# Altium PCB PCB.PcbDoc
Units mm, origin at the board's own origin, x right, y up, seen from the top; angles counter-clockwise.
Board outline 50 x 83.2 mm, 2 copper layers (Top Layer, Bottom Layer); 23 components, 7 nets, 107 pads, 0 vias.
Unrouted connection lines stored in the file: 42.
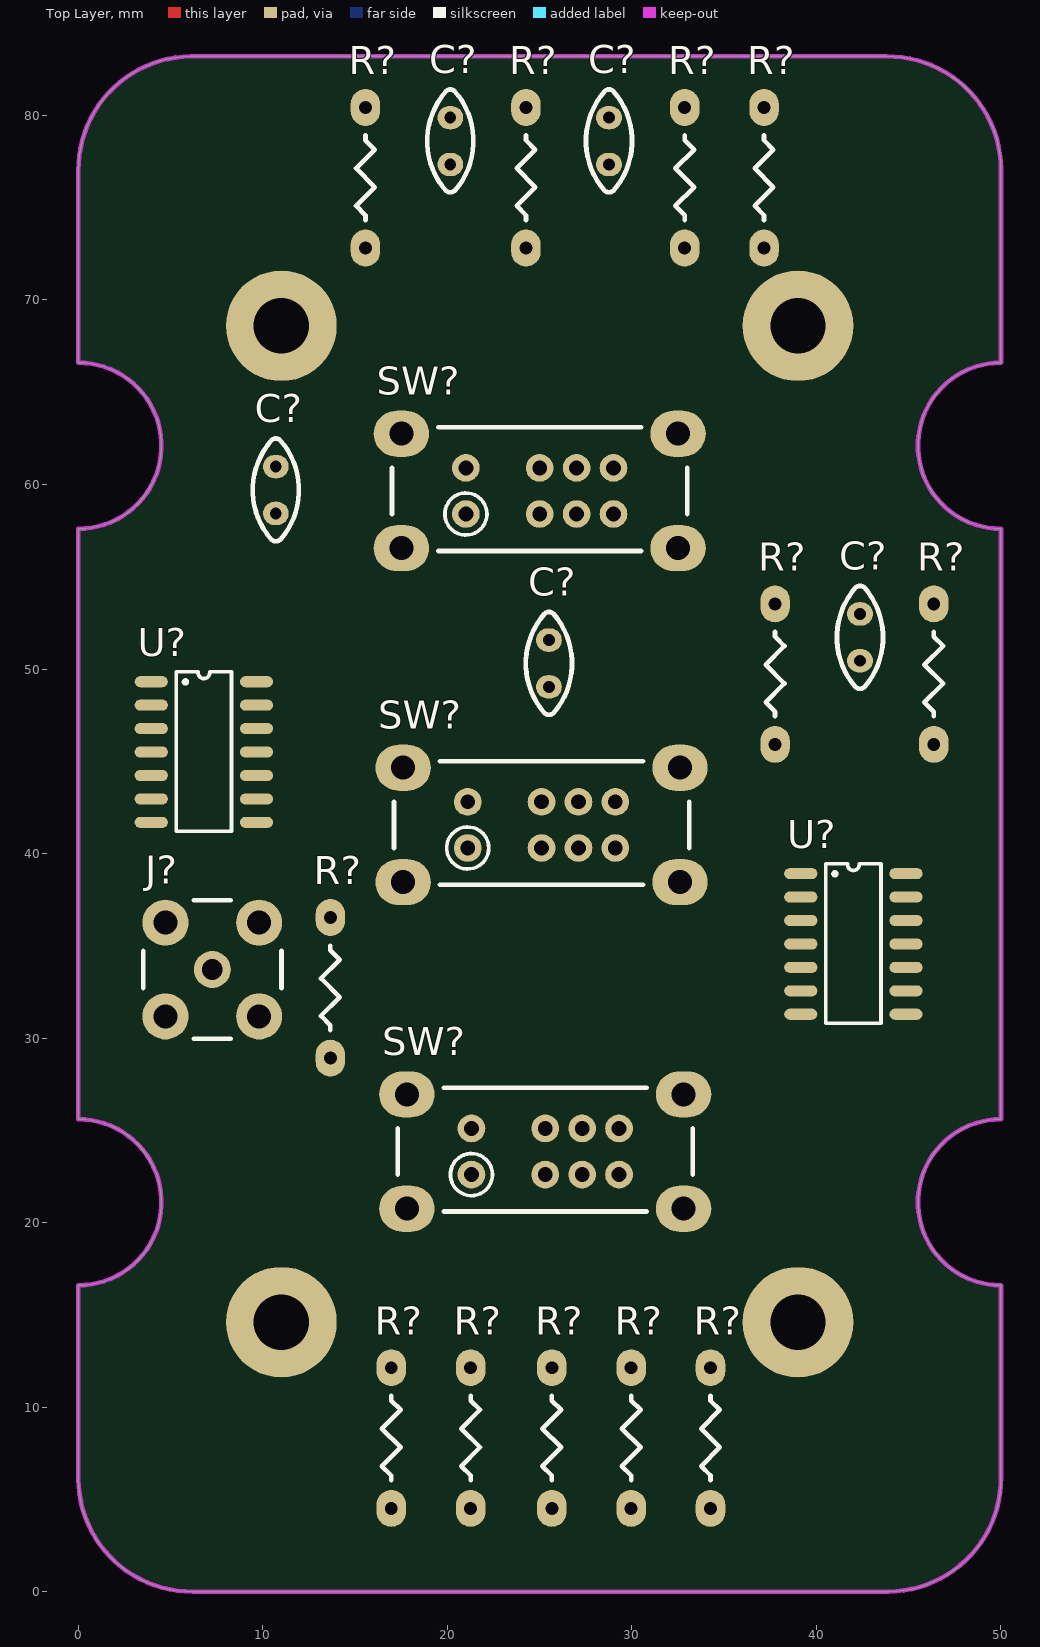
[diagram p0: Top Layer view]
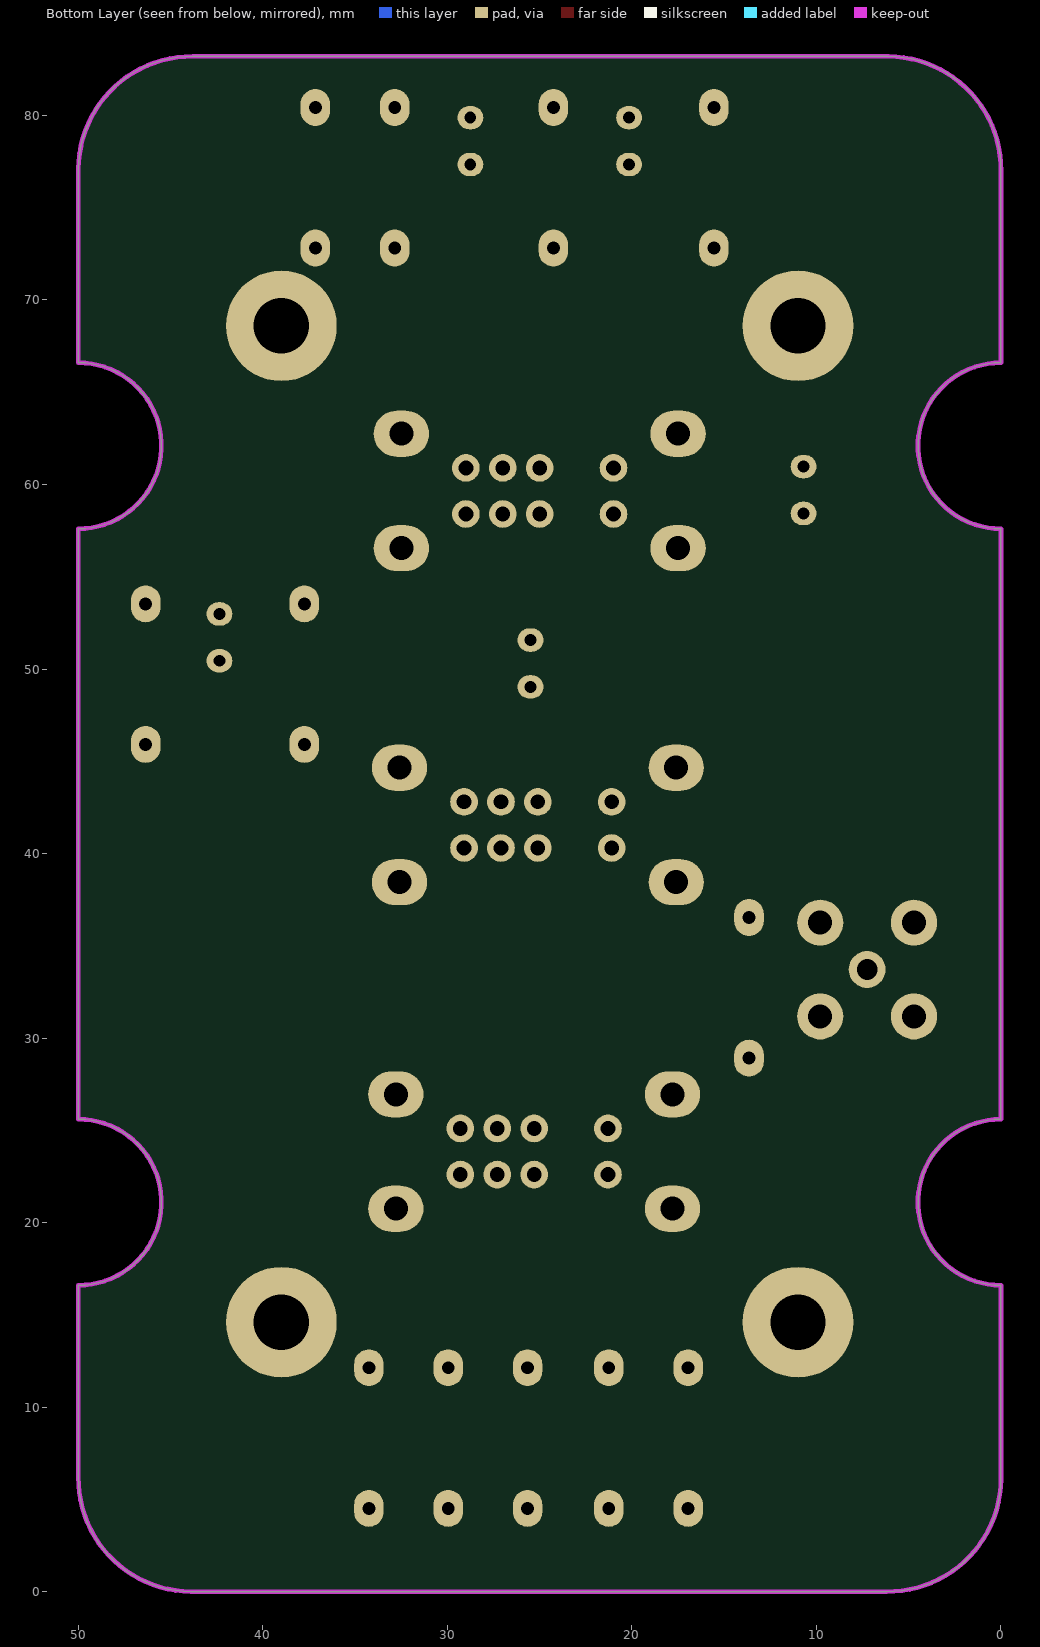
[diagram p1: Bottom Layer view, seen from below]

## Layer stack, top to bottom
Top Solder: solder mask 0.0102, Solder Resist, Dk 3.5
Top Layer: signal copper 0.0356
Dielectric 1: dielectric 0.32, FR-4, Dk 4.8
Bottom Layer: signal copper 0.0356
Bottom Solder: solder mask 0.0102, Solder Resist, Dk 3.5

## Board outline
0,6.1 0,16.6 ccw(c0,21.1) 0,25.6 0,57.6 ccw(c0,62.1) 0,66.6 0,77 cw(c6.15,77.05) 6.1,83.2 43.8,83.2 cw(c43.85,77.05) 50,77.1 50,66.6 ccw(c50,62.1) 50,57.6 50,25.6 ccw(c50,21.1) 50,16.6 50,6.2 cw(c43.85,6.15) 43.9,0 6.2,0 cw(c6.15,6.15)
cut-out: 45.6,62.5

## Design rules (kind name [scope] priority, off if disabled: settings)
Clearance [All] p1: gap=0.2 ignorepadtopadclearanceinfootprint=FALSE
HoleSize [All] p1: absolutevalues=TRUE maxlimit=10 minlimit=0.5 maxpercent=80.000 minpercent=20.000
PolygonConnect [All] p1: connectstyle=Relief reliefconductorwidth=0.254 reliefentries=4 polygonreliefangle="90 Angle" airgapwidth=0.254
RoutingVias [All] p1: holewidth=0.5 width=0.8 viastyle="Through Hole" minholewidth=0.5 minwidth=0.6 maxholewidth=0.5 maxwidth=1
ShortCircuit [All] p1: allowed=TRUE
SolderMaskExpansion [All] p1: expansion=0.102 istentingtop=FALSE
Width [All] p1: maxlimit=2.54 minlimit=0.254 preferedwidth=0.508
28 further rules are at their usual default settings.

## Classes and differential pairs
component class Sheet: C? J? R? SW? U?

## Components (designator, comment, footprint, x,y, rotation, side; value= is the part's Value field where it differs from the comment)
C? "220pF" C-BP-Ceramic-DIP 25.5,50.3 r90 top
C? "120pF" C-BP-Ceramic-DIP 20.157,78.613 r90 top
C? "3pF" C-BP-Ceramic-DIP 42.357,51.713 r90 top
C? "100nF" C-BP-Ceramic-DIP 10.7,59.7 r90 top
C? "1pF" C-BP-Ceramic-DIP 28.757,78.613 r90 top
J? "Mini BNC" BNC-Mini_No3D 7.257,33.713 r0 top
R? "1K" R-1/4W-DIP-Blue 34.257,4.513 r90 top
R? "150R" R-1/4W-DIP-Blue 46.357,45.913 r90 top
R? "1K" R-1/4W-DIP-Blue 37.157,72.813 r90 top
R? "180R" R-1/4W-DIP-Blue 16.957,4.513 r90 top
R? "1.8M" R-1/4W-DIP-Blue 29.957,4.513 r90 top
R? "20K" R-1/4W-DIP-Blue 15.557,72.813 r90 top
R? "120R" R-1/4W-DIP-Blue 32.857,72.813 r90 top
R? "200K" R-1/4W-DIP-Blue 21.257,4.513 r90 top
R? "150R" R-1/4W-DIP-Blue 37.757,45.913 r90 top
R? "100K" R-1/4W-DIP-Blue 13.657,28.913 r90 top
R? "2M" R-1/4W-DIP-Blue 24.257,72.813 r90 top
R? "3K" R-1/4W-DIP-Blue 25.657,4.513 r90 top
SW? "MFP223P" MFP223P 21.3,22.6 r90 top
SW? "MFP223P" MFP223P 21.1,40.3 r90 top
SW? "MFP223P" MFP223P 21,58.4 r90 top
U? "TL084CD" SO-14 6.8,45.5 r0 top
U? "TL084CD" SO-14 42,35.1 r0 top

## Footprints (in the part's own frame and the unit in brackets; to place one, negate y for a bottom-side part, rotate by r counter-clockwise, add the part's x,y. Pads: shape width x height; smd on the part's side, far side on the other; paste and mask are expansions set on the pad)
BNC-Mini_No3D [mm]
  round 2.5 hole 1.3 mask+0.102: 0(-2.54,-2.54) 0(-2.54,2.54) 0(2.54,-2.54) 0(2.54,2.54)
  round 2 hole 1.12 mask+0.102: 1(0,0)
  silkscreen extent -3.75,-3.75 3.75,3.75
C-BP-Ceramic-DIP [mil]
  oval 50x55 hole 25: 1(-50,0) 2(50,0)
  silkscreen extent -110,-49 110,49, body extent -115,-34 115,33, height 272
MFP223P [mm]
  oval 2.5x3 hole 1.3: 0(-1.85,3.5) 0(-1.85,-11.5) 0(4.35,3.5) 0(4.35,-11.5)
  round 1.5 hole 0.8: 1(0,0) 2(0,-4) 3(0,-6) 4(0,-8) 5(2.5,0) 6(2.5,-4) 7(2.5,-6) 8(2.5,-8)
  silkscreen extent -2,-12 4.7,4, body extent -2,-12 4.7,4, height 14.68
R-1/4W-DIP-Blue [mm]
  oval 2x1.6 hole 0.7 paste+0 mask+0.04: 1(0,0) 2(7.62,0)
  silkscreen extent 1.52,-0.51 6.1,0.51, body extent -0.15,-1.11 7.82,1.09, height 2.6
SO-14 [mm]
  oval 1.8x0.6 smd: 1(-2.85,3.81) 2(-2.85,2.54) 3(-2.85,1.27) 4(-2.85,0) 5(-2.85,-1.27) 6(-2.85,-2.54) 7(-2.85,-3.81) 8(2.85,-3.81) 9(2.85,-2.54) 10(2.85,-1.27) 11(2.85,0) 12(2.85,1.27) 13(2.85,2.54) 14(2.85,3.81)
  silkscreen extent -1.5,-4.3 1.5,4.35, body extent -3,-4.4 3,4.4, height 1.7

## Part data
C? C? C? C? C?: library part CAP, "Ceramic Disk Capacitor 50V"
J?: library part 1274571-1, "CONN MINI BNC JACK STR 75OHM PCB", Contact Resistance=12mR, Dielectric Material=PTFE, Frequency=2GHz, Insulation Resistance=1GR, Manufacturer="TE Connectivity", Max Operating Temperature=85°C, Min Operating Temperature=-40°C, Package Quantity=50, Supplier Part Number 1=A30539-ND, Voltage Rating=300V, Body Material=Brass, Body Plating=Nickel, Category="RF / Coaxial Connectors", ComponentLink1Description=https://datasheet.ciiva.com/11763/0900766b80b27325-11763478.pdf?src-supplier=RSComponents, ComponentLink1URL=https://datasheet.ciiva.com/11763/0900766b80b27325-11763478.pdf?src-supplier=RSComponents, ComponentLink2Description=https://datasheet.ciiva.com/22726/eng-ss-501-585-a-22726636.pdf?src-supplier=Element14, ComponentLink2URL=https://datasheet.ciiva.com/22726/eng-ss-501-585-a-22726636.pdf?src-supplier=Element14, ComponentLink3Description=https://datasheet.ciiva.com/642/c-1274571-b-642904.pdf?src-supplier=Digi-Key, ComponentLink3URL=https://datasheet.ciiva.com/642/c-1274571-b-642904.pdf?src-supplier=Digi-Key, ComponentLink4Description=https://datasheet.ciiva.com/30164/eng-cs-1307191-mini-bnc-connectors-0307-30164565.pdf?src-supplier=Onlinecomponents.com, ComponentLink4URL=https://datasheet.ciiva.com/30164/eng-cs-1307191-mini-bnc-connectors-0307-30164565.pdf?src-supplier=Onlinecomponents.com, ComponentLink5Description=https://datasheet.ciiva.com/16652/eng-cs-1307191-mini-bnc-connectors-0307-16652971.pdf?src-supplier=Avnet+Europe, ComponentLink5URL=https://datasheet.ciiva.com/16652/eng-cs-1307191-mini-bnc-connectors-0307-16652971.pdf?src-supplier=Avnet+Europe, ComponentLink6Description=https://datasheet.ciiva.com/14568/70083431-14568396.pdf?src-supplier=Allied+Electronics, ComponentLink6URL=https://datasheet.ciiva.com/14568/70083431-14568396.pdf?src-supplier=Allied+Electronics, Connector Type=BNC,Jack, Contact Material=Bronze, Contact Plating=Gold, Depth=7.54mm, ELV=Compliant, Fastening Type=Bayonet, Gender=Female, Impedance=75R, Insulation Material=Polytetrafluoroethylene, Lead Free="Lead Free", Length=7.54mm, Manufacturer Part Number=1274571-1, Mating Cycles=500, Max Frequency=2GHz, Mount="Through Hole,PCB,Cable", Number of Positions=1, Orientation=Straight, Packaging=Box, PCB Mount Retention=Without, PCB Mounting Orientation=Vertical, Polarity=Normal, Pricing 1="1=5/95000, 10=5/40400, 25=5/11840, 50=4/99940, 100=4/76140, 250=4/16624, 500=4/04720, 1000=3/45202, 2500=3/33298 (USD)", Radiation Hardening=No, REACH SVHC=Unknown, RoHS=Yes, Sealable="No (Without)", Stock 1=1165, Supplier 1=Digi-Key, Tail Length=4mm, Termination=Solder, Voltage Rating (AC)=300V
R? R? R? R? R? R? R? R? R? R? R? R?: library part RES, "Resistor DIP 1/4W 1%"
SW? SW? SW?: "Switch Slide ON ON ON Extended Top Slide 0.35A 30VDC 10000Cycle PC Pins Bracket Mount/Through Hole", Manufacturer=Knitter-Switch, Max Current Rating=200mA, Max Operating Temperature=85°C, Max Voltage Rating (DC)=30V, Min Operating Temperature=-20°C, Actuator Material=Polyoxymethylene, Category=Uncategorized, ComponentLink1Description=https://datasheet.ciiva.com/26847/getdatasheetpartid-740636-26847254.pdf?src-supplier=Verical, ComponentLink1URL=https://datasheet.ciiva.com/26847/getdatasheetpartid-740636-26847254.pdf?src-supplier=Verical, Contact Material="Copper Alloy", Contact Plating=Nickel,Silver, Depth=6.5mm, Housing Material=Resin, Lead Free="Lead Free", Length=16mm, Manufacturer Part Number=MFP223P, Mechanical Life=10000Cycles, Mount="Through Hole,Brackets", Radiation Hardening=No, RoHS=Yes, RoHS Compliant=Yes, Supplier 1="Arrow Europe", Supplier Part Number 1=MFP223P, Termination="PC Pins"
U? U?: "IC OPAMP JFET 4MHZ 14SO", Case/Package=SOIC, Dual Supply Voltage=15V, Input Bias Current=200pA, Input Offset Voltage (Vos)=10mV, Manufacturer=STMicroelectronics, Max Dual Supply Voltage=18V, Max Operating Temperature=70°C, Max Supply Voltage=36V, Min Dual Supply Voltage=3V, Min Input Voltage=-12V, Min Operating Temperature=0°C, Nominal Supply Current=2.5mA, Operating Supply Current=1.4mA, Output Current=40mA, Package Quantity=50, Power Dissipation=680mW, Supplier Part Number 1=497-TL084CD-ND, Voltage Gain=106.02dB, Amplifier Type="GENERAL PURPOSE", Bandwidth=4MHz, Category="Amplifiers - Audio", Common Mode Rejection Ratio=70dB, ComponentLink1Description=https://datasheet.ciiva.com/15129/getdatasheetpartid-40720-15129705.pdf?src-supplier=Verical, ComponentLink1URL=https://datasheet.ciiva.com/15129/getdatasheetpartid-40720-15129705.pdf?src-supplier=Verical, ComponentLink2Description=https://datasheet.ciiva.com/29306/155629-da-01-en-op-verst-tl084cd-stm-29306876.pdf?src-supplier=Conrad, ComponentLink2URL=https://datasheet.ciiva.com/29306/155629-da-01-en-op-verst-tl084cd-stm-29306876.pdf?src-supplier=Conrad, ComponentLink3Description=https://datasheet.ciiva.com/1796/cd00000493-1796695.pdf?src-supplier=Digi-Key, ComponentLink3URL=https://datasheet.ciiva.com/1796/cd00000493-1796695.pdf?src-supplier=Digi-Key, ComponentLink4Description=https://datasheet.ciiva.com/16385/cd00000493-16385768.pdf?src-supplier=Future+Electronics, ComponentLink4URL=https://datasheet.ciiva.com/16385/cd00000493-16385768.pdf?src-supplier=Future+Electronics, Gain Bandwidth Product=4MHz, Height=1.65mm, Input Offset Voltage-Max=10mV, Lead Free="Lead Free", Length=8.75mm, Manufacturer Part Number=TL084CD, Max Input Voltage=15V, Mount="Surface Mount", Number of Amplifiers=4, Number of Channels=4, Number of Circuits=4, Number of Elements=4, Number of Pins=14, Operating Supply Voltage=18V, Output Current per Channel=40mA, Packaging=Rail/Tube, Pricing 1="1=0/56000, 10=0/47700, 25=0/44520, 100=0/35620, 250=0/33072, 500=0/27984, 1000=0/21624, 2500=0/21000 (USD)", Radiation Hardening=No, REACH SVHC="No SVHC", Rise Time=50ns, RoHS=Yes, RoHS Compliant=Yes, Slew Rate=16V/µs, Slew Rate-Nom=16V/µs, Stock 1=3951, Supplier 1=Digi-Key, Supply Current=2.5mA, Technology=BIFET, Unity Gain Bandwidth Product=4MHz, Weight=0.01lb, Width=4mm

## Free pads (board coordinates)
  round 6 hole 3 unplated paste+0 mask+0.04: 0(11,14.6) 0(11,68.6) 0(39,14.6) 0(39,68.6)

## Nets (pads, with @x,y where several pads share a name; then routed paths per layer and width w, separated by ;. In a path a pad name is that pad's centre, name@x,y a point inside that pad or via, vN(x,y) a via of type N, cw(c..) or ccw(c..) an arc to the next point about the centre after c; other vN are vias at no path point)
-5: R?.1@25.657,4.513
GND: C?.2@20.157,79.883 J?.0 pad.0 R?.1@15.557,72.813 R?.1@21.257,4.513 R?.1@32.857,72.813 R?.2@37.157,80.433 SW?.0 SW?.4@29.3,22.6
NetC?_1: C?.1@20.157,77.343 C?.1@28.757,77.343 R?.2@15.557,80.433 R?.2@24.257,80.433 SW?.4@29.1,40.3
NetC?_2: C?.2@25.5,51.57 C?.2@28.757,79.883 C?.2@42.357,52.983 R?.1@13.657,28.913 R?.1@24.257,72.813 R?.1@29.957,4.513 SW?.2@25.3,22.6
NetR?_1: R?.1@37.157,72.813 R?.2@25.657,12.133 R?.2@34.257,12.133 U?.9@44.85,32.56
NetR?_2: R?.2@46.357,53.533 SW?.1@21,58.4 U?.6@3.95,42.96 U?.7@3.95,41.69
NetSW?_2: SW?.2@25.1,40.3 U?.5@3.95,44.23
pads on no net: C?.1@10.7,58.43 C?.1@25.5,49.03 C?.1@42.357,50.443 C?.2@10.7,60.97 J?.1 R?.1@16.957,4.513 R?.1@34.257,4.513 R?.1@37.757,45.913 R?.1@46.357,45.913 R?.2@13.657,36.533 R?.2@16.957,12.133 R?.2@21.257,12.133 R?.2@29.957,12.133 R?.2@32.857,80.433 R?.2@37.757,53.533 SW?.1@21.1,40.3 SW?.1@21.3,22.6 SW?.2@25,58.4 SW?.3 SW?.4@29,58.4 SW?.5 SW?.6 SW?.7 SW?.8 U?.1 U?.2 U?.3 U?.4 U?.5@39.15,33.83 U?.6@39.15,32.56 U?.7@39.15,31.29 U?.8 U?.9@9.65,42.96 U?.10 U?.11 U?.12 U?.13 U?.14

## Keep-outs
Keep-Out Layer:
  lines w0.254: 0,6.1 ccw(c6.15,6.15) 6.2,0 43.9,0 ccw(c43.85,6.15) 50,6.2 50,16.6 cw(c50,21.1) 50,25.6 50,57.6 cw(c50,62.1) 50,66.6 50,77.1 ccw(c43.85,77.05) 43.8,83.2 6.1,83.2 ccw(c6.15,77.05) 0,77 0,67 0,66.6 cw(c0,62.1) 0,57.6 0,25.6 cw(c0,21.1) 0,16.6 0,6.1